# Altium PCB LoadCellV1_1.PcbDoc
Units mm, origin at the board's own origin, x right, y up, seen from the top; angles counter-clockwise.
Board outline 80 x 50 mm, 2 copper layers (Top Layer, Bottom Layer); 60 components, 52 nets, 202 pads, 201 vias.
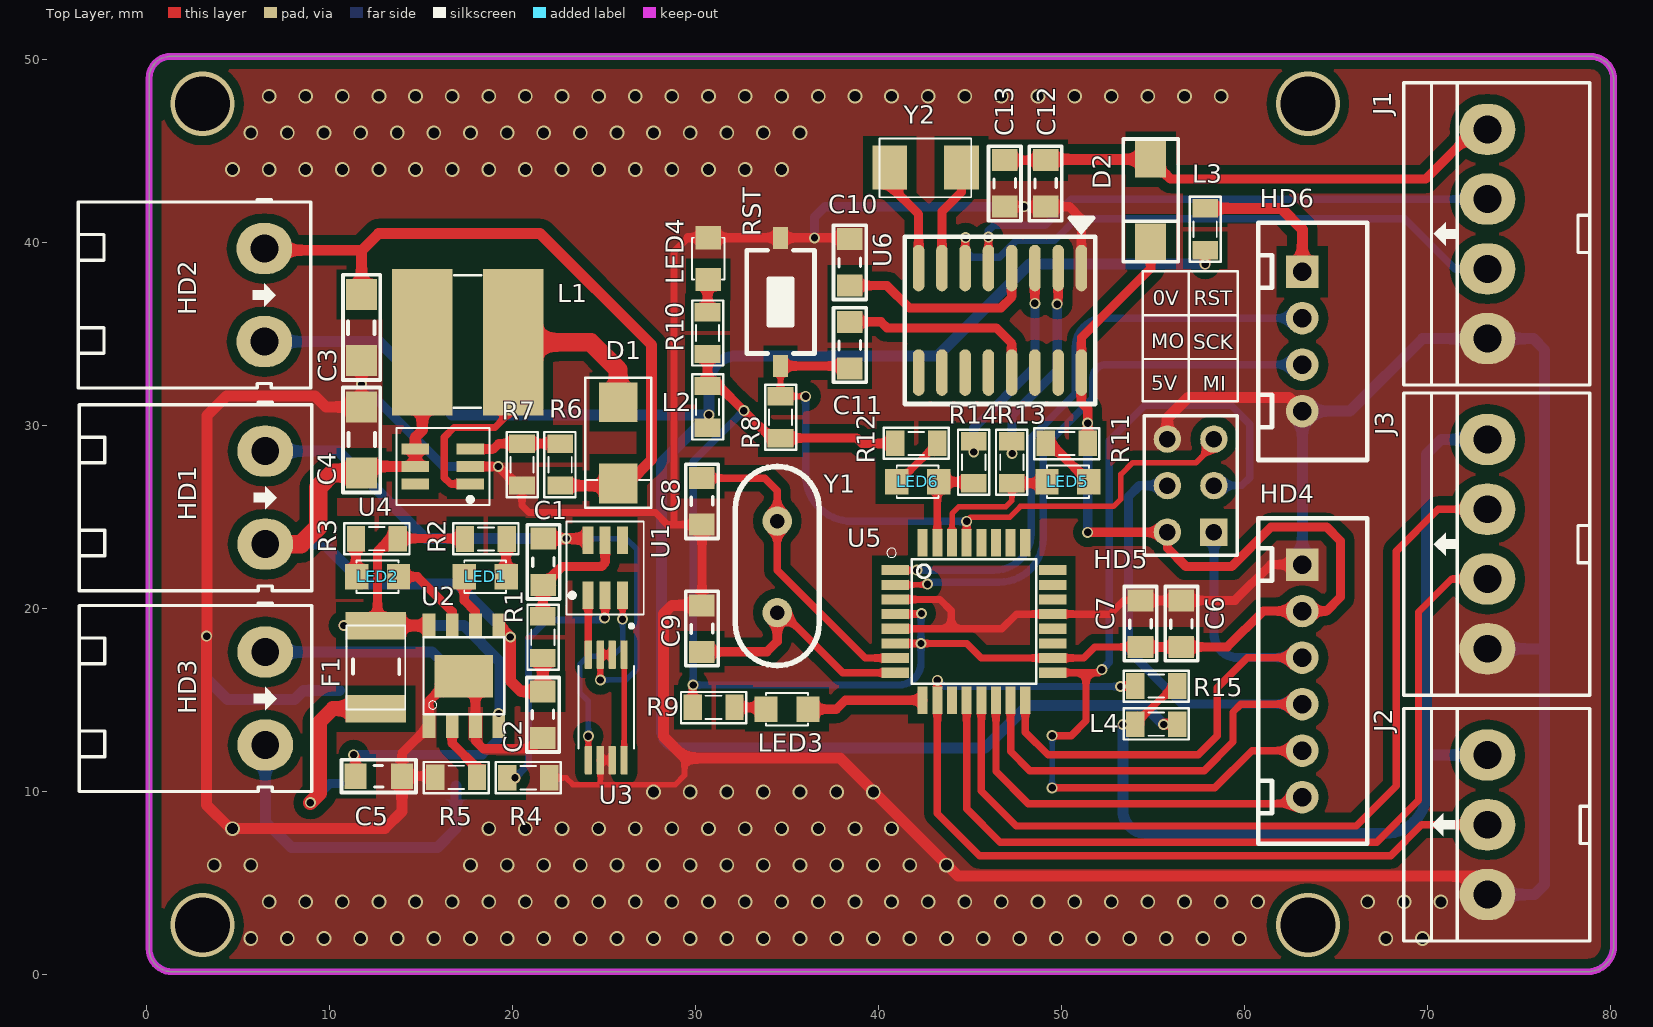
[diagram p0: Top Layer view]
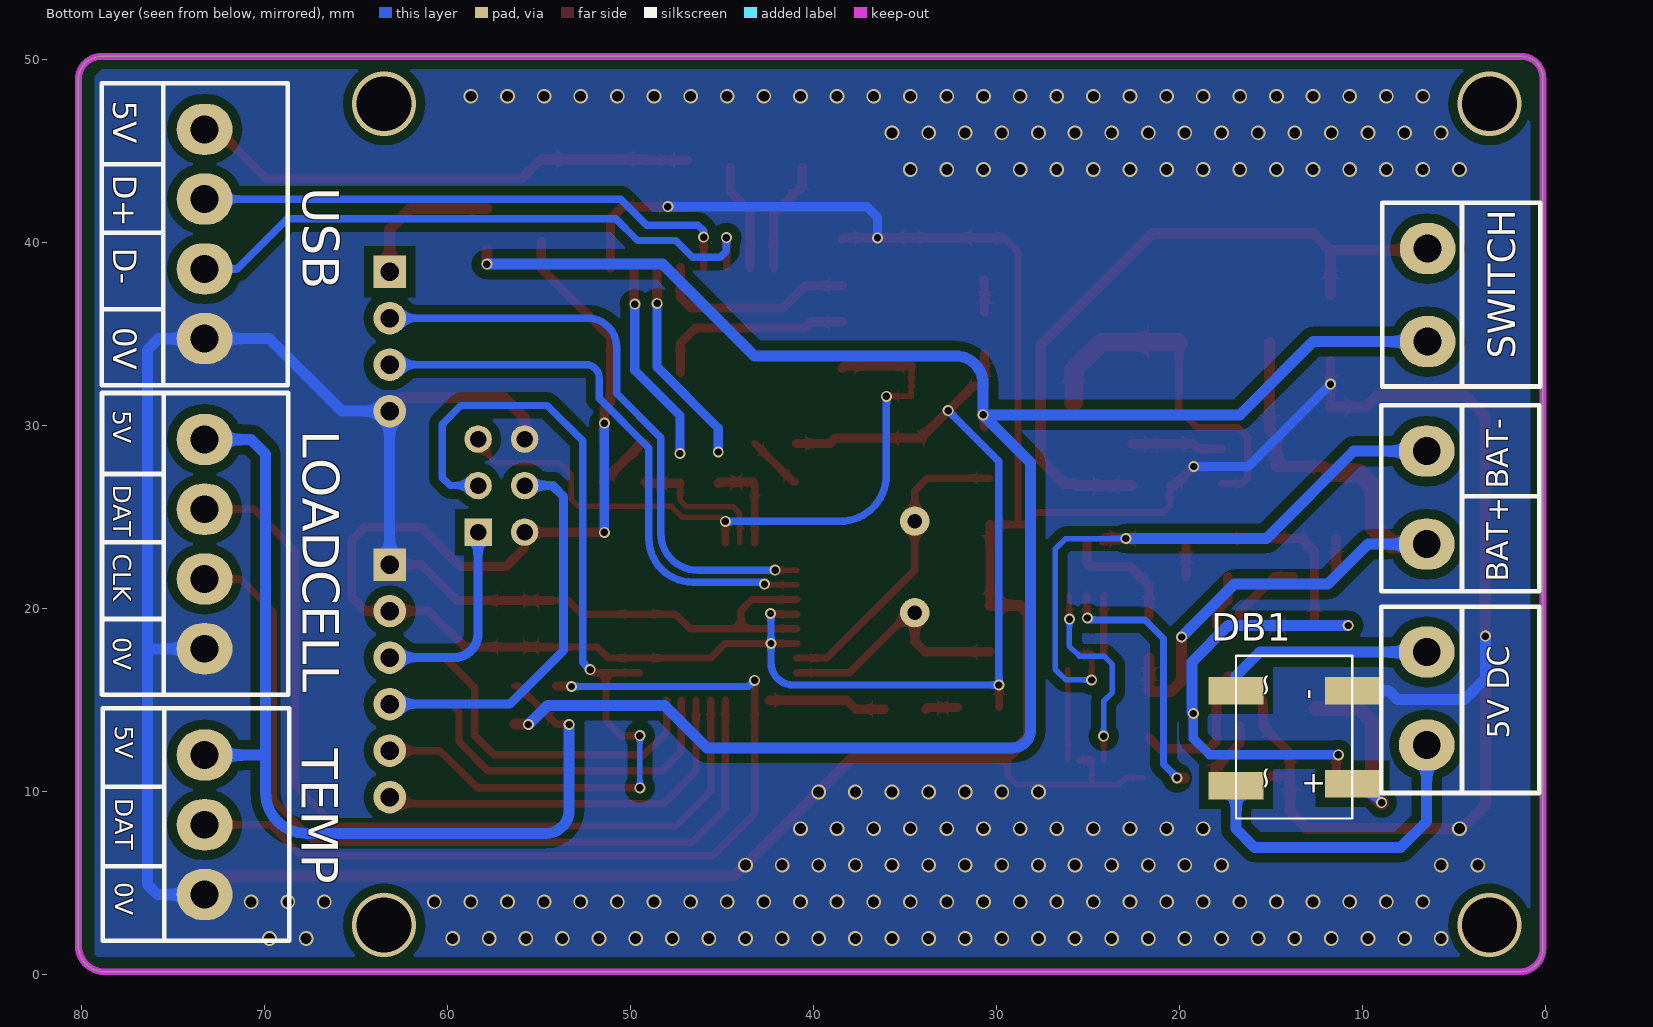
[diagram p1: Bottom Layer view, seen from below]
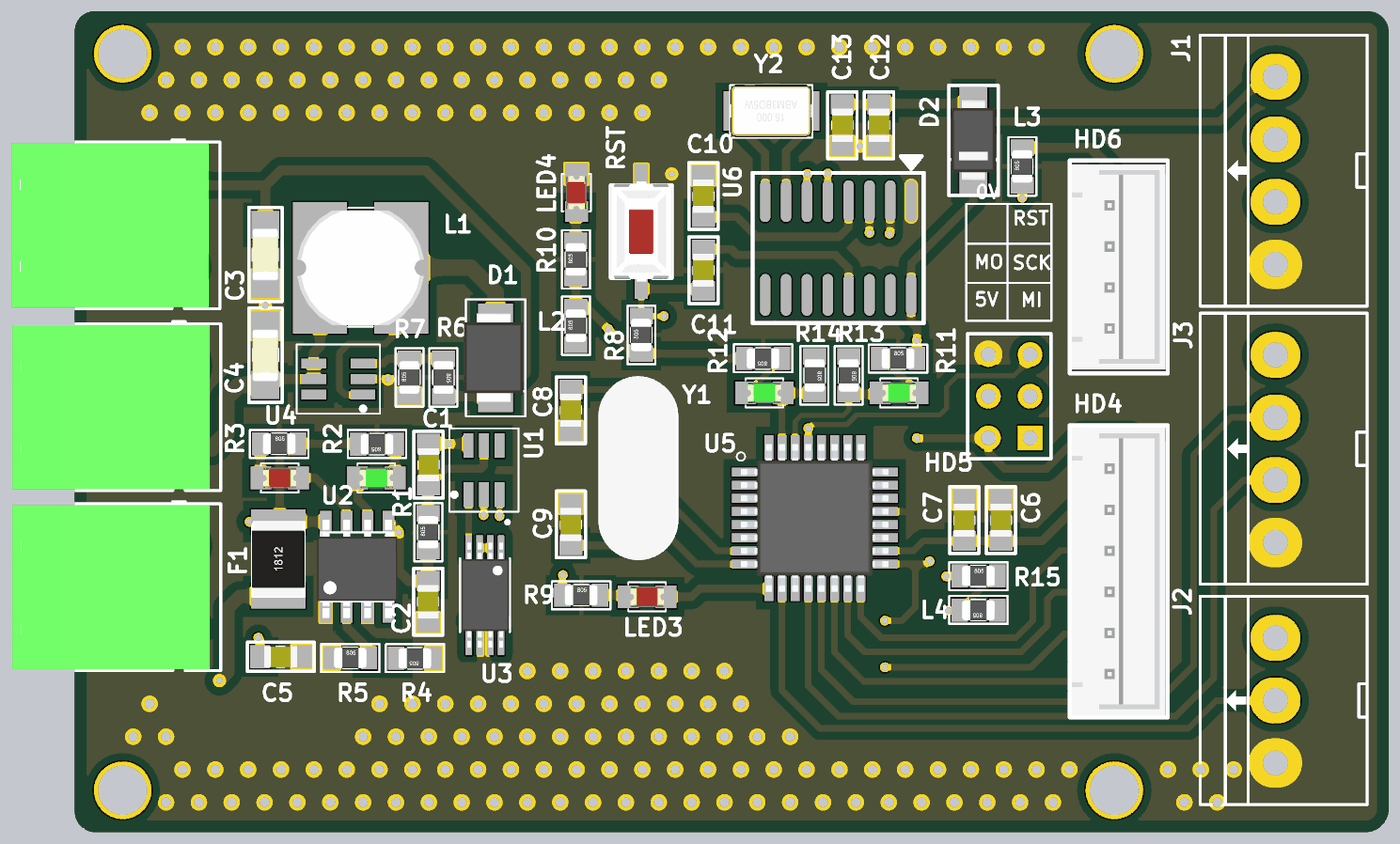
[diagram p2: 3D render of the assembled board from above, using the file's embedded part models]

## Layer stack, top to bottom
Top Solder: solder mask 0.0102, Solder Resist, Dk 3.5
Top Layer: signal copper 0.0356
Dielectric 1: dielectric 0.32, FR-4, Dk 4.8
Bottom Layer: signal copper 0.0356
Bottom Solder: solder mask 0.0102, Solder Resist, Dk 3.5

## Board outline
0.152,1.435 0.152,48.971 cw(c1.346,48.971) 1.346,50.165 78.882,50.165 cw(c78.882,48.895) 80.152,48.895 80.152,1.59 cw(c78.727,1.59) 78.727,0.165 1.422,0.165 cw(c1.422,1.435)

## Design rules (kind name [scope] priority, off if disabled: settings)
Clearance [All] p1: gap=0.254 ignorepadtopadclearanceinfootprint=FALSE except(0: Arc-Hole Track-Hole SMDPad-Hole THPad-Hole Via-Hole Fill-Hole Poly-Hole Region-Hole Text-Hole; 0.508: Arc-Fill Arc-Poly Arc-Region Track-Fill Track-Poly Track-Region SMDPad-Fill SMDPad-Poly SMDPad-Region THPad-Fill THPad-Poly THPad-Region Via-Fill Via-Poly Via-Region Fill-Fill Fill-Poly Fill-Region Poly-Poly Poly-Region Region-Region)
PolygonConnect [All] p1: connectstyle=Direct reliefconductorwidth=0.254 reliefentries=4 polygonreliefangle="90 Angle" airgapwidth=0.254
RoutingVias [All] p1: holewidth=0.4 width=0.6 viastyle="Through Hole" minholewidth=0.4 minwidth=0.6 maxholewidth=0.8 maxwidth=1
SolderMaskExpansion [All] p1: expansion=0.102
Width [All] p1: maxlimit=1.3 minlimit=0.3 preferedwidth=0.5
30 further rules are at their usual default settings.

## Classes and differential pairs
component class "U_[05] Sensor": J2 J3 L4 R15
component class "U_[04] CH340": C10 C11 C12 C13 D2 J1 LED5 LED6 R11 R12 R13 R14 U6 Y2
component class "U_[03] HMI Screen": HD6 L3
component class "U_[02] MCU": C6 C7 C8 C9 HD4 HD5 L2 LED3 LED4 R8 R9 R10 RST U5 Y1
component class "U_[01] Power Supply": C1 C2 C3 C4 C5 D1 DB1 F1 HD1 HD2 HD3 L1 LED1 LED2 R1 R2 R3 R4 R5 R6 R7 U1 U2 U3 U4

## Components (designator, comment, footprint, x,y, rotation, side; value= is the part's Value field where it differs from the comment)
C1 "104" CAP_0805 21.717,22.555 r270 top value=33p
C2 "10uF" CAP_0805 21.641,14.202 r90 top value=33p
C3 "22uF" CAP_1206 11.76,35.382 r90 top value=33p
C4 "22uF" CAP_1206 11.76,29.185 r270 top value=33p
C5 "104" CAP_0805 12.7,10.82 r180 top value=33p
C6 "10uF" CAP_0805 56.567,19.177 r270 top value=33p
C7 "104" CAP_0805 54.335,19.177 r270 top value=33p
C8 "Capacitor Ceramic" CAP_0805 30.328,25.857 r90 top value=33p
C9 "Capacitor Ceramic" CAP_0805 30.378,18.912 r270 top value=33p
C10 "104" CAP_0805 38.456,38.913 r270 top value=33p
C11 "104" CAP_0805 38.456,34.395 r270 top value=33p
C12 "104" CAP_0805 49.098,43.22 r90 top value=33p
C13 "10uF" CAP_0805 46.866,43.22 r90 top value=33p
D1 "SS34" DO-214AA 25.73,29.108 r90 top value="Diode c?m 1N5408"
D2 "1N5819" "DO-214AB SMA" 54.864,44.45 r270 top value=1N4007
DB1 "DB207S" DB207S 13.868,12.852 r270 bottom
F1 "F1A" RES-SMD-1812 12.548,16.535 r90 top value=Fuse
HD1 "PIN" HED2T 6.502,28.6 r270 top
HD2 "SWITCH" HED2T 6.452,39.665 r270 top
HD3 "DC_IN" HED2T 6.502,17.628 r270 top
HD4 "SDCARD" CON_6P 63.144,22.403 r270 top
HD5 "ISP" HDR2X3_CEN 58.318,24.181 r90 top
HD6 "HMI" CON_4P 63.144,38.405 r270 top
J1 "PWR" HED4B 73.254,34.747 r90 top value="Header 4"
J2 "DS18B20" "HED 3P 15EDG3.81" 76.378,8.268 r90 top
J3 "HX711" HED4B 73.254,17.805 r90 top value="Header 4"
L1 "22uH" CD75-220 17.501,34.544 r0 top value="150 mH"
L2 "100uH" RES-SMD-0805 30.658,31.013 r90 top value="150 mH"
L3 "100uH" RES-SMD-0805 57.836,40.716 r90 top value="150 mH"
L4 "100uH" RES-SMD-0805 55.169,13.69 r180 top value="150 mH"
LED1 "LED" LED-0805-Green 19.66,21.742 r180 top value="LED 3 ly Single Colour"
LED2 "LED" LED-0805-Red 11.493,21.742 r0 top value="LED 3 ly Single Colour"
LED3 "LED" LED-0805-Red 33.858,14.503 r0 top value="LED 3 ly Single Colour"
LED4 "LED" LED-0805-Red 30.696,37.973 r90 top value="LED 3 ly Single Colour"
LED5 "LED" LED-0805-Green 51.486,26.924 r180 top value="LED 3 ly Single Colour"
LED6 "LED" LED-0805-Green 40.996,26.924 r0 top value="LED 3 ly Single Colour"
R1 "100R" RES-SMD-0805 21.666,18.44 r90 top
R2 "1k" RES-SMD-0805 18.555,23.8 r180 top
R3 "1k" RES-SMD-0805 12.598,23.825 r0 top
R4 "1k" RES-SMD-0805 20.865,10.759 r180 top
R5 "1k" RES-SMD-0805 16.928,10.784 r0 top
R6 "15k" RES-SMD-0805 22.606,27.864 r270 top
R7 "2k" RES-SMD-0805 20.523,27.864 r90 top
R8 "10k" RES-SMD-0805 34.646,30.455 r90 top
R9 "1k" RES-SMD-0805 30.988,14.605 r0 top
R10 "1k" RES-SMD-0805 30.658,35.052 r90 top
R11 "1k" RES-SMD-0805 50.28,29.02 r0 top
R12 "1k" RES-SMD-0805 42.062,29.02 r180 top
R13 "1k" RES-SMD-0805 47.283,27.991 r270 top
R14 "1k" RES-SMD-0805 45.2,27.991 r270 top
R15 "4k7" RES-SMD-0805 55.169,15.773 r0 top
RST "SW-SMD" SW-SMD 34.646,36.754 r90 top (schematic designator S1)
U1 "DW01A" SOT23-6 25.067,22.225 r90 top
U2 "TP4056" TP4056 17.348,16.332 r90 top
U3 "FS8205A" FS8205A 25.07,14.605 r270 top
U4 "MT3608" MT3608 16.231,27.762 r180 top
U5 "ATmega328-AU" "TQFP 32" 45.212,19.355 r0 top
U6 "CH340G" SO16 46.634,35.747 r270 top
Y1 "16Mhz" XTAL 34.468,22.327 r90 top
Y2 "12MHz" "XTAL 5032 SMD" 42.545,44.094 r180 top

## Footprints (in the part's own frame and the unit in brackets; to place one, negate y for a bottom-side part, rotate by r counter-clockwise, add the part's x,y. Pads: shape width x height; smd on the part's side, far side on the other; paste and mask are expansions set on the pad)
CAP_0805 [mm]
  rect 1.2x1.4 smd: 1(-1.27,-0.025) 2(1.27,-0.025)
  silkscreen extent -2.03,-0.91 2.03,0.86, body extent -1.01,-0.66 1.01,0.61, height 0.61
CAP_1206 [mm]
  rect 1.7x1.7 smd: 1(-1.829,0) 2(1.778,0)
  silkscreen extent -2.9,-1.02 2.84,1.02, body extent -1.63,-0.8 1.57,0.8, height 0.94
CD75-220 [mm] "Power Inductor CD75 7.8x7x5mm"
  rect 3.3x8 smd: 1(-2.413,0) 2(2.54,0)
  silkscreen extent -0.71,-3.58 0.81,3.66, body extent -3.82,-3.5 3.92,3.5, height 5
CON_4P [mil]
  rect 70x70 hole 39.37 unplated: 1(0,0)
  round 70 hole 39.37 unplated: 2(100,0) 3(200,0)
  round 70 hole 39.37 unplated mask+4: 4(300,0)
  silkscreen extent -105,-95 405,140, body extent -96,-90 396,134, height 276
CON_6P [mil]
  rect 70x70 hole 39.37 unplated: 1(0,0)
  round 70 hole 39.37 unplated: 2(100,0) 3(200,0)
  round 70 hole 39.37 unplated mask+4: 4(300,0) 5(400,0) 6(500,0)
  silkscreen extent -100,-95 600,140, body extent -94,-90 594,134, height 276
DB207S [mm] "Bridge Rectifiers 2A 1000V"
  rect 1.5x3 smd: 1(2.413,3.302) 2(2.54,-3.048) 3(-2.667,-3.048) 4(-2.667,3.302)
  silkscreen extent -4.57,-3.05 4.32,3.3
DO-214AA [mm] "DO-214AA Diode Middle Size"
  rect 2.18x2.12 smd: 1(2.164,-0.051) 2(-2.266,-0.051)
  silkscreen extent -3.61,-1.86 3.51,1.76, body extent -2.75,-1.73 2.65,1.89, height 2.43
"DO-214AB SMA" [mm]
  rect 2x1.7 smd: 1(-0.092,0) 2(4.408,0)
  silkscreen extent -1.2,-1.5 5.5,1.51, body extent -0.37,-1.35 4.63,1.35, height 2.28
FS8205A [mm]
  rrect25% 1.56x0.4 smd: 1(-2.88,1.031) 2(-2.88,0.381) 3(-2.88,-0.269) 4(-2.88,-0.919) 5(2.88,-0.919) 6(2.88,-0.269) 7(2.88,0.381) 8(2.88,1.031)
  silkscreen extent -4.54,-1.46 2.25,1.57, body extent -3.2,-1.4 3.2,1.53, height 1.2
HDR2X3_CEN [mm] "Connector; Header; 3x2 Position"
  rect 1.5x1.5 hole 0.9: 1(0,0)
  round 1.5 hole 0.9: 2(2.54,0) 3(5.08,0) 4(0,2.54) 5(2.54,2.54) 6(5.08,2.54)
  silkscreen extent -1.27,-1.27 6.35,3.81, body extent -1.27,-1.27 6.35,3.81, height 7
HED2T [mil] "Header 2, 2 pin, hight 300mil, Pin to Pin 200, Colour Green"
  oval 110x120 hole 60: 1(0,0) 2(200,0)
  silkscreen extent -105,-400 300,100, body extent -97,-399 297,73, height 334
HED4B [mil] "Header 4, 4 pin, hight 300mil, Pin to Pin 150, Colour White"
  oval 110x120 hole 60: 1(0,0) 2(150,0) 3(300,0) 4(450,0)
  silkscreen extent -100,-220 550,180
"HED 3P 15EDG3.81" [mil]
  oval 110x120 hole 60: 1(-153,123) 2(-3,123) 3(147,123)
  silkscreen extent -253,-97 247,303
LED-0805-Green [mil]
  rect 50x55 smd: 1(0,0) 2(90,0)
  silkscreen extent 0,-35 90,35, body extent 5,-25 85,25, height 43
LED-0805-Red [mil]
  rect 50x55 smd: 1(0,0) 2(90,0)
  silkscreen extent 0,-35 90,35, body extent 5,-25 85,25, height 43
MT3608 [mm] "High Efficiency 1.2MHz  2A Step Up Converter"
  rect 1.5x0.6 smd: 1(-1.475,0.95) 2(-1.475,0) 3(-1.475,-0.95) 4(1.525,-0.95) 5(1.525,0) 6(1.525,0.95)
  silkscreen extent -2.51,-2.11 2.57,2.11, body extent -1.73,-1.52 1.78,1.53, height 1.45
RES-SMD-0805 [mil]
  rect 39.37x55 smd: 1(-45,0) 2(45,0)
  silkscreen extent -70,-34 70,33, body extent -39,-25 39,25, height 31
RES-SMD-1812 [mm] "Chip Capacitor, Body 3.2x2.5mm, IPC Medium Density"
  rect 1.5x3.3 smd: 1(-1.996,0) 2(2.54,0)
  silkscreen extent -2.04,-1.6 2.54,1.6, body extent -2,-1.6 2.5,1.6, height 0.6
SO16 [mm]
  oval 2.54x0.635 smd: 1(-2.854,4.445) 2(-2.854,3.175) 3(-2.854,1.905) 4(-2.854,0.635) 5(-2.854,-0.635) 6(-2.854,-1.905) 7(-2.854,-3.175) 8(-2.854,-4.445) 9(2.854,-4.445) 10(2.854,-3.175) 11(2.854,-1.905) 12(2.854,-0.635) 13(2.854,0.635) 14(2.854,1.905) 15(2.854,3.175) 16(2.854,4.445)
  silkscreen extent -5.59,-5.21 4.57,5.21, body extent -3.47,-4.95 3.47,4.95, height 1.75
SOT23-6 [mm] "SOT23, 5-Leads, Body 3.0x3.0mm (max), Pitch 0.95mm, IPC Medium Density"
  rect 1.5x0.6 smd: 1(-1.5,0.95) 2(-1.5,0) 3(-1.5,-0.95) 4(1.5,-0.95) 5(1.5,0) 6(1.5,0.95)
  silkscreen extent -2.54,-2.11 2.54,2.11, body extent -1.75,-1.52 1.75,1.53, height 1.45
SW-SMD [mm] "Switch SMD type"
  rect 1.2x0.8 smd: 1(-3.5,0) 2(3.5,0)
  silkscreen extent -2.82,-1.85 2.82,1.85, body extent -3.05,-1.85 3.05,1.85, height 2.5
TP4056 [mm]
  rect 1.3x0.7 smd: 1(-2.75,1.905) 2(-2.75,0.635) 3(-2.75,-0.635) 4(-2.75,-1.905) 5(2.75,-1.905) 6(2.75,-0.635) 7(2.75,0.635) 8(2.75,1.905)
  rect 2.3x3.2 smd: GND(-0.025,0)
  silkscreen extent -2.1,-2.2 2.1,2.2, body extent -3.13,-2.45 2.87,2.45, height 1.75
"TQFP 32" [mm] "TQFP 32 for ATmega328P"
  rect 1.5x0.55 smd: 1(-4.3,2.743) 2(-4.3,1.943) 3(-4.3,1.143) 4(-4.3,0.343) 5(-4.3,-0.457) 6(-4.3,-1.257) 7(-4.3,-2.057) 8(-4.3,-2.857) 17(4.3,-2.857) 18(4.3,-2.057) 19(4.3,-1.257) 20(4.3,-0.457) 21(4.3,0.343) 22(4.3,1.143) 23(4.3,1.943) 24(4.3,2.743)
  rect 0.55x1.5 smd: 9(-2.8,-4.357) 10(-2,-4.357) 11(-1.2,-4.357) 12(-0.4,-4.357) 13(0.4,-4.357) 14(1.2,-4.357) 15(2,-4.357) 16(2.8,-4.357) 25(2.8,4.243) 26(2,4.243) 27(1.2,4.243) 28(0.4,4.243) 29(-0.4,4.243) 30(-1.2,4.243) 31(-2,4.243) 32(-2.8,4.243)
  silkscreen extent -4.75,-3.46 3.4,3.95, body extent -4.5,-4.55 4.5,4.45, height 1.2
XTAL [mm]
  round 1.6 hole 0.8: 1(-2.552,0.001) 2(2.448,0.001)
  silkscreen extent -5.44,-2.29 5.44,2.29, body extent -5.55,-2.32 5.62,2.35, height 3.63
"XTAL 5032 SMD" [mm] "SMD 5032 XTAL Footprint"
  rect 1.9x2.4 smd: 1(-1.981,0) 2(1.93,0)
  silkscreen extent -2.51,-1.57 2.49,1.63, body extent -2.5,-1.6 2.5,1.6, height 1.31

## Part data
C1 C2 C3 C4 C5 C6 C7 C8 C9 C10 C11 C12 C13: library part CapSMD, "Capacitor", LatestRevisionDate=17-Jul-2002, LatestRevisionNote="Re-released for DXP Platform.", PackageReference=RAD-0.3, Published=8-Jun-2000, Publisher="Altium Limited"
D1: library part 1N5822, "Schottky Rectifiers"
D2: library part D1A_1, "Diode 1A"
DB1: library part "Diode Bridge Flate", "Diode Bridge"
F1: library part Fuse, "Fuse", Designed by=VanDungEvn
HD1 HD2 HD3: library part Header2, "Header IDC, 2 x 1 Pin Vertical 2.54mm Pitch (Non-Boxed, Male)", Manufacturer="Würth Elektronik eiSos GmbH", partNo=613002143121, ComponentLink1 Description=Manufacturer, ComponentLink1URL=http://www.we-online.com, ComponentLink2 Description=Datasheet, ComponentLink2URL=http://katalog.we-online.de/em/datasheet/6130xx143121.pdf, Created by="Karrer Zheng", Created Date="29 March 2013", NoPins=02
HD4: library part Header6, "Header IDC, 6 x 1 Pin Vertical 2.54mm Pitch (Non-Boxed, Male)", Manufacturer="Würth Elektronik eiSos GmbH", partNo=613002143121, ComponentLink1 Description=Manufacturer, ComponentLink1URL=http://www.we-online.com, ComponentLink2 Description=Datasheet, ComponentLink2URL=http://katalog.we-online.de/em/datasheet/6130xx143121.pdf, Created by="Karrer Zheng", Created Date="29 March 2013", NoPins=02
HD5: library part "Header 3X2A", "Header, 3-Pin, Dual row", LatestRevisionDate=17-Jul-2002, LatestRevisionNote="Re-released for DXP Platform.", Publisher="Altium Limited"
HD6: library part JP4, Manufacturer="Würth Elektronik eiSos GmbH", partNo=613004143121, ComponentLink1 Description=Manufacturer, ComponentLink1URL=http://www.we-online.com, ComponentLink2 Description=Datasheet, ComponentLink2URL=http://katalog.we-online.de/em/datasheet/6130xx143121.pdf, Created by="Karrer Zheng", Created Date="29 March 2013", NoPins=04
J1 J3: library part Hed4, "Header 4 (Green)"
J2: library part KF3, Manufacturer="Würth Elektronik eiSos GmbH", partNo=691103110003, ComponentLink1 Description=Manufacturer, ComponentLink1URL=http://www.we-online.com, ComponentLink2 Description=Datasheet, ComponentLink2URL=http://katalog.we-online.de/em/datasheet/6911031100xx.pdf, Created by="Karrer Zheng", Created Date="29 October 2013", NoPins=3
L1: library part Inductor, "Inductor 22uH CD75"
L2 L3 L4: library part Inductor, "Inductor"
LED1 LED2 LED3 LED4 LED5 LED6: "LED Single colour Green and Red"
R1 R2 R3 R4 R5 R6 R7 R8 R9 R10 R11 R12 R13 R14 R15: library part "Resistor - SMD", "Resistor", Manufacturer="Generic Components", Class=Passive, Published=08/06/2000, Publisher="Altium Hobart Technology Centre"
RST: "Switch", LatestRevisionDate=17-Jul-2002, LatestRevisionNote="Re-released for DXP Platform.", PackageReference=SPST-2, Published=24-Mar-1999, Publisher="Altium Limited"
U1: "One Cell Lithium-ion/Polymer Battery Protection IC"
U2: "Complete single cell Li-Ion battery with a constant current / constant voltage linear charger"
U4: "High Efficiency 1.2MHz 2A Step Up Converter"
U5: "8-bit AVR Microcontroller, 32KB Flash, 1KB EEPROM, 2KB SRAM, 32-pin TQFP, Industrial Grade (-40癈 to 85癈)", Code_JEDEC=MS-026-ABA, DatasheetVersion="revA, Jan-2010", PackageDescription="32-Lead, 7x7x1.0 mm Body, 0.8mm Lead Pitch, Thin Profile Plastic Quad Flat Package (TQFP)", PackageReference=32A, PackageVersion="revB, Oct-2001", Published=1-Apr-2010, Publisher="Altium Limited"
U6: "High and Low Side Driver", ComponentLink1Description="Manufacturer Link", ComponentLink1URL=http://www.irf.com/, ComponentLink2Description=Datasheet, ComponentLink2URL=http://www.irf.com/product-info/datasheets/data/ir2110.pdf, DatasheetVersion=PD60147J, LatestRevisionDate=04-Mar-2005, LatestRevisionNote="Stylized 3D Model Added.", Note="Pins 4, 8 and 14 are not connected", PackageDescription="DIP; 14 Leads; Row Spacing 7.62 mm; Pitch 2.54 mm", PackageReference=PDIP14, Published=8-Jun-2000, Publisher="Altium Limited"
Y1 Y2: library part XTAL, "Crystal Oscillator", LatestRevisionDate=17-Jul-2002, LatestRevisionNote="Re-released for DXP Platform.", PackageReference=R38, Published=8-Jun-2000, Publisher="Altium Limited"

## Via types
v1: diameter 0.8, hole 0.6, Top Layer to Bottom Layer, 156 vias
v2: diameter 0.6, hole 0.4, Top Layer to Bottom Layer, 41 vias
v3: diameter 3.5, hole 3, Top Layer to Bottom Layer, 4 vias

## Nets (pads, with @x,y where several pads share a name; then routed paths per layer and width w, separated by ;. In a path a pad name is that pad's centre, name@x,y a point inside that pad or via, vN(x,y) a via of type N, cw(c..) or ccw(c..) an arc to the next point about the centre after c; other vN are vias at no path point)
+5V: C5.2 F1.2 R2.2 R3.2 U2.4 U2.8 | length 37.6
  Top Layer w0.5: v2(11.328,12.014) 11.43,11.913 C5.2 ; F1.2 12.632,19.075 12.632,23.123 13.335,23.825 R3.2 17.386,23.825 R2.2 ; U2.8@15.436,19.075 U2.8 ; U2.4 v2(19.253,14.275)
  Top Layer w0.6: v2(10.795,19.075) F1.2 ; F1.2@12.632,19.075 U2.8@15.436,19.075
  Bottom Layer w0.5: v2(11.328,12.014) 18.364,12.014 19.253,12.903 v2(19.253,14.275)
  Bottom Layer w0.6: v2(10.795,19.075) 17.348,19.075 19.329,17.094 19.329,14.351 v2(19.253,14.275)
+5V_HMI: HD6.1 L3.2 | length 8.1
  Top Layer w0.6: L3.2 62.001,41.859 63.144,40.716 HD6.1
+5V_MCU: C6.2 C7.2 D2.2 HD4.2 HD5.4 L2.2 R8.1 R9.1 R10.1 R11.2 R12.2 U5.4 U5.6 U5.18 U6.16 | length 112.1
  Top Layer w0.4: R9.1 29.845,15.799 v2(29.87,15.824) ; U5.6 v2(42.316,18.098) 44.818,18.098 45.618,17.298 U5.18 51.207,17.298 51.816,17.907 C7.2 ; U5.4 42.304,19.698 v2(42.342,19.736)
  Top Layer w0.5: R10.1 L2.2 31.293,32.156 v2(32.639,30.81) 34.138,29.312 R8.1 38.811,29.312 39.103,29.02 R12.2 ; v2(51.423,24.167) 55.765,24.167 HD5.4 55.778,23.317 56.794,22.301 59.284,22.301 61.443,24.46 64.465,24.46 65.227,23.698 65.227,20.625 64.465,19.863 HD4.2 61.011,19.863 59.055,17.907 C6.2 C7.2 ; R11.2 v2(51.423,30.124) 51.423,30.898 51.079,31.242 U6.16 51.079,34.798 54.864,38.583 D2.2
  Bottom Layer w0.4: v2(32.639,30.81) 29.87,28.042 v2(29.87,15.824) 41.097,15.824 ccw(c41.097,17.043) 42.316,17.043 v2(42.316,18.098) 42.316,19.71 v2(42.342,19.736)
  Bottom Layer w0.5: v2(51.423,24.167) v2(51.423,30.124)
+5V_OUT: HD2.2 L2.1 L3.1 L4.1 | length 107.6
  Top Layer w0.4: L2.1 30.734,29.947 v2(30.734,30.582)
  Top Layer w0.6: v2(55.575,13.665) 55.6,13.69 L4.1 ; v2(57.836,38.811) L3.1
  Bottom Layer w0.6: HD2.2 12.71,34.585 16.713,30.582 v2(30.734,30.582) ; v2(55.575,13.665) 54.534,14.707 48.133,14.707 45.822,12.395 29.134,12.395 cw(c29.134,13.386) 28.143,13.386 28.143,27.991 v2(30.734,30.582) ; v2(57.836,38.811) 48.235,38.811 43.231,33.807 32.258,33.807 ccw(c32.258,32.283) 30.734,32.283 v2(30.734,30.582)
+5V_SEN: J2.3 J3.4 L4.2 R15.2 | length 52.6
  Top Layer w0.4: v2(53.34,13.665) 53.365,13.69 L4.2 56.109,15.773 R15.2
  Bottom Layer w0.6: v2(53.34,13.665) 53.34,8.992 ccw(c54.61,8.992) 54.61,7.722 67.691,7.722 ccw(c67.691,9.957) 69.926,9.957 69.926,12.014 ; J2.3 69.939,12.002 69.926,12.014 ; J3.4 70.714,29.235 69.926,28.448 69.926,12.014
+5V_USB: C12.2 C13.2 D2.1 J1.4 | length 28
  Top Layer w0.5: C13.2 C12.2 ; D2.1 55.947,43.459 69.875,43.459 72.593,46.177 J1.4
  Top Layer w0.6: C12.2 49.175,44.542 D2.1
"BAT -": C1.1 HD1.1 U1.6 U3.2 U3.3 | length 35.8
  Top Layer w0.3: v2(24.801,16.104) U3.3
  Top Layer w0.4: U3.3 U3.2
  Top Layer w0.6: C1.1 v2(22.936,23.825) 24.017,23.825 U1.6
  Bottom Layer w0.3: v2(22.936,23.825) 26.213,23.825 26.797,23.241 26.797,16.688 26.213,16.104 v2(24.801,16.104)
  Bottom Layer w0.6: HD1.1 10.49,28.6 15.265,23.825 v2(22.936,23.825)
BAT+: C2.2 C4.2 HD1.2 L1.1 R1.1 U2.5 U4.4 U4.5 | length 40.8
  Top Layer w0.6: C4.2 12.116,27.762 U4.5 U4.4 14.705,29.361 15.088,29.743 L1.1 ; U2.5 v2(19.888,18.447) 19.888,16.053 20.469,15.472 C2.2 R1.1
  Top Layer w1: HD1.2 8.458,23.52 9.398,24.46 9.398,26.619 10.185,27.407 C4.2
  Bottom Layer w0.6: HD1.2 9.703,23.52 11.887,21.336 16.999,21.336 v2(19.888,18.447)
CH340_RX: LED5.2 R13.2 U5.30 | length 8.1
  Top Layer w0.3: U5.30 44.012,25.191 44.374,25.552 46.939,25.552 47.283,25.896 R13.2
  Top Layer w0.5: R13.2 49.124,26.848 LED5.2
CH340_TX: LED6.2 R14.2 U5.31 | length 5.3
  Top Layer w0.3: LED6.2@43.212,26.854 LED6.2
  Top Layer w0.4: U5.31 LED6.2@43.212,26.854
  Top Layer w0.5: LED6.2 45.123,26.924 R14.2
D+: J1.3 U6.5 | length 30
  Top Layer w0.4: U6.5 v2(45.999,40.284)
  Bottom Layer w0.4: v2(45.999,40.284) 45.999,40.64 46.304,40.945 49.098,40.945 50.521,42.367 J1.3
D-: J1.2 U6.6 | length 33.1
  Top Layer w0.4: U6.6 44.729,40.234 v2(44.755,40.259)
  Bottom Layer w0.4: v2(44.755,40.259) 44.755,39.522 45.085,39.192 46.609,39.192 47.523,40.107 49.606,40.107 50.8,41.3 68.732,41.3 71.475,38.557 J1.2
DS18_DAT: J2.2 R15.1 U5.10 | length 49.9
  Top Layer w0.4: v2(43.212,16.085) U5.10 43.212,8.807 45.517,6.502 67.97,6.502 69.659,8.191 J2.2
  Top Layer w0.5: v2(53.213,15.748) 53.238,15.773 R15.1
  Bottom Layer w0.4: v2(43.212,16.085) 43.549,15.748 v2(53.213,15.748)
GND: C2.1 C3.1 C4.1 C5.1 C6.1 C7.1 C8.1 C9.1 C10.1 C12.1 C13.1 DB1.4 HD4.1 HD5.6 HD6.4 J1.1 J2.1 J3.1 LED4.2 R4.1 R5.1 R7.1 RST.2 U2.1 U2.3 U3.6 U3.7 U4.2 U5.3 U5.5 U5.21 U6.1 | length 311.6
  Top Layer w0.3: R4.1 22.936,10.759 23.306,10.389 24.765,10.389 ; U3.6 24.801,10.424 24.765,10.389 ; 29.413,11.836 29.413,10.897 28.905,10.389 24.765,10.389
  Top Layer w0.4: R7.1 20.523,25.629 20.904,25.248 27.813,25.248 28.473,24.587 28.829,24.587 ; U3.6 U3.7 ; 29.591,40.259 28.829,39.497 28.829,24.587 ; C8.1 28.829,24.587 ; U5.5 43.967,18.898 ; U5.3 43.358,20.498 43.967,19.888 43.967,18.898 ; C7.1 53.391,20.447 52.642,19.698 U5.21 47.536,19.698 46.736,18.898 43.967,18.898
  Top Layer w0.5: C4.1 v2(11.76,32.258) C3.1 ; R5.1 15.723,10.846 C5.1 13.97,12.109 U2.1 15.443,14.961 16.789,16.307 17.348,16.307 17.983,15.672 U2.3 17.983,12.776 18.415,12.344 21.079,12.344 C2.1 ; U4.2 v2(19.228,27.762) 20.269,26.721 R7.1 ; 29.591,40.259 LED4.2 34.64,40.259 RST.2 v2(36.5,40.254) 38.359,40.254 C10.1 ; C9.1 C8.1 ; C13.1 v2(47.955,41.95) C12.1 50.43,41.95 51.079,41.3 U6.1 ; C7.1 C6.1 59.461,20.447 61.417,22.403 HD4.1
  Top Layer w0.6: v2(3.302,18.491) 3.302,9.271 4.597,7.976 13.03,7.976 13.97,8.915 C5.1 ; v2@3.327,18.542 3.327,30.556 4.394,31.623 9.22,31.623 9.83,31.013 C4.1 ; C9.1 28.716,20.182 28.245,19.71 28.245,13.005 29.413,11.836 37.897,11.836 44.348,5.385 72.25,5.385 J2.1 ; HD5.6 55.778,30.404 56.896,31.521 62.408,31.521 HD6.4
  Bottom Layer w0.5: v2(11.76,32.258) 16.256,27.762 v2(19.228,27.762) ; v2(36.5,40.254) 36.5,41.377 37.073,41.95 v2(47.955,41.95)
  Bottom Layer w0.6: v2(3.302,18.491) 3.302,16.18 4.445,15.037 8.103,15.037 8.585,15.519 DB1.4 ; HD4.1 HD6.4 65.761,30.785 69.723,34.747 J1.1 75.768,34.747 76.378,34.138 76.378,17.729 ; J2.1 75.832,4.381 76.378,4.928 76.378,17.729 ; J3.1 76.302,17.805 76.378,17.729
  other v1: 5.711,1.984 7.711,1.984 9.711,1.984 11.711,1.984 13.711,1.984 15.711,1.984 17.711,1.984 19.711,1.984 21.711,1.984 23.711,1.984 25.711,1.984 27.711,1.984 29.711,1.984 31.711,1.984 33.711,1.984 35.711,1.984 37.711,1.984 39.711,1.984 41.711,1.984 43.711,1.984 45.711,1.984 47.711,1.984 49.711,1.984 51.711,1.984 53.711,1.984 55.711,1.984 57.711,1.984 59.711,1.984 67.711,1.984 69.711,1.984 6.711,3.984 8.711,3.984 10.711,3.984 12.711,3.984 14.711,3.984 16.711,3.984 18.711,3.984 20.711,3.984 22.711,3.984 24.711,3.984 26.711,3.984 28.711,3.984 30.711,3.984 32.711,3.984 34.711,3.984 36.711,3.984 38.711,3.984 40.711,3.984 42.711,3.984 44.711,3.984 46.711,3.984 48.711,3.984 50.711,3.984 52.711,3.984 54.711,3.984 56.711,3.984 58.711,3.984 60.711,3.984 66.711,3.984 68.711,3.984 70.711,3.984 3.711,5.984 5.711,5.984 17.711,5.984 19.711,5.984 21.711,5.984 23.711,5.984 25.711,5.984 27.711,5.984 29.711,5.984 31.711,5.984 33.711,5.984 35.711,5.984 37.711,5.984 39.711,5.984 41.711,5.984 43.711,5.984 4.711,7.984 18.711,7.984 20.711,7.984 22.711,7.984 24.711,7.984 26.711,7.984 28.711,7.984 30.711,7.984 32.711,7.984 34.711,7.984 36.711,7.984 38.711,7.984 40.711,7.984 27.711,9.984 29.711,9.984 31.711,9.984 33.711,9.984 35.711,9.984 37.711,9.984 39.711,9.984 4.711,43.984 6.711,43.984 8.711,43.984 10.711,43.984 12.711,43.984 14.711,43.984 16.711,43.984 18.711,43.984 20.711,43.984 22.711,43.984 24.711,43.984 26.711,43.984 28.711,43.984 30.711,43.984 32.711,43.984 34.711,43.984 5.711,45.984 7.711,45.984 9.711,45.984 11.711,45.984 13.711,45.984 15.711,45.984 17.711,45.984 19.711,45.984 21.711,45.984 23.711,45.984 25.711,45.984 27.711,45.984 29.711,45.984 31.711,45.984 33.711,45.984 35.711,45.984 6.711,47.984 8.711,47.984 10.711,47.984 12.711,47.984 14.711,47.984 16.711,47.984 18.711,47.984 20.711,47.984 22.711,47.984 24.711,47.984 26.711,47.984 28.711,47.984 30.711,47.984 32.711,47.984 34.711,47.984 36.711,47.984 38.711,47.984 40.711,47.984 42.711,47.984 44.711,47.984 46.711,47.984 48.711,47.984 50.711,47.984 52.711,47.984 54.711,47.984 56.711,47.984 58.711,47.984
HMI_RX: HD6.2 U5.1 | length 33
  Top Layer w0.3: U5.1 v2(42.088,22.098)
  Bottom Layer w0.4: v2(42.088,22.098) 46.329,22.098 ccw(c46.329,24.105) 48.336,24.105 48.336,29.337 50.749,31.75 50.749,34.29 cw(c52.324,34.29) 52.324,35.865 HD6.2
HMI_TX: HD6.3 U5.2 | length 31.3
  Top Layer w0.3: U5.2 42.71,21.298 v2(42.672,21.336)
  Bottom Layer w0.4: v2(42.672,21.336) 42.78,21.444 46.6,21.444 ccw(c46.6,23.834) 48.99,23.834 48.99,28.772 51.708,31.49 51.708,32.607 cw(c52.426,32.607) 52.426,33.325 HD6.3
HX711_CLK: J3.2 U5.12 | length 47.1
  Top Layer w0.4: U5.12 44.812,9.061 46.634,7.239 67.208,7.239 69.494,9.525 69.494,19.812 71.298,21.615 J3.2
HX711_DAT: J3.3 U5.13 | length 48.1
  Top Layer w0.4: U5.13 45.612,10.039 47.523,8.128 66.091,8.128 68.275,10.312 68.275,23.139 70.561,25.425 J3.3
NetC1_2: C1.2 R1.2 U1.5 | length 6.8
  Top Layer w0.5: R1.2 21.666,21.26 C1.2 22.708,22.301 24.867,22.301 25.067,22.502 U1.5
NetC3_2: C3.2 D1.2 HD2.1 R6.2 | length 38.3
  Top Layer w0.6: HD2.1@6.452,39.573 11.735,39.573 11.76,39.548 ; C3.2 11.76,39.548 ; R6.2 25.659,26.721 D1.2 26.309,26.843 27.61,28.143 27.61,34.392 21.514,40.488 12.7,40.488 11.76,39.548
NetC8_2: C8.2 U5.7 Y1.2 | length 17.2
  Top Layer w0.4: C8.2 33.782,27.127 34.467,26.442 Y1.2 34.467,22.099 39.268,17.298 U5.7
NetC9_2: C9.2 U5.8 Y1.1 | length 13.7
  Top Layer w0.3: Y1.1 Y1.1@34.759,19.775
  Top Layer w0.4: Y1.1@34.759,19.775 38.036,16.498 U5.8
  Top Layer w0.5: C9.2 33.898,17.642 34.467,18.211 Y1.1
NetC10_2: C10.2 U6.4 | length 11.2
  Top Layer w0.5: C10.2 40.462,37.643 41.681,36.424 46.688,36.424 47.269,37.005 U6.4 U6.4@47.269,38.633
NetC11_1: C11.1 U6.13 | length 10.9
  Top Layer w0.5: C11.1 40.129,35.665 40.462,35.331 46.431,35.331 47.269,34.493 U6.13
NetD1_1: D1.1 L1.2 U4.1 | length 20
  Top Layer w0.4: U4.1 16.622,26.812 16.281,27.153 16.281,29.362 16.815,29.896 19.05,29.896 20.041,30.886 L1.2
  Top Layer w1: L1.2 24.282,34.544 25.781,33.045 D1.1
NetDB1_1: DB1.1 F1.1 | length 10
  Top Layer w0.8: v2(8.966,9.398) 9.474,9.906 9.474,13.818 10.196,14.54 F1.1
  Bottom Layer w0.5: v2(8.966,9.398) 10.008,10.439 DB1.1
NetDB1_2: DB1.2 HD3.2 | length 17.9
  Bottom Layer w0.6: HD3.2 6.502,8.382 7.925,6.96 15.9,6.96 16.916,7.976 DB1.2
NetDB1_3: DB1.3 HD3.1 | length 11.8
  Bottom Layer w0.6: HD3.1 15.621,17.628 16.916,16.332 DB1.3
NetLED1_1: LED1.1 R2.1 | length 2.1
  Top Layer w0.5: LED1.1 19.66,23.762 R2.1
NetLED1_2: LED1.2 U2.6 | length 2.9
  Top Layer w0.5: LED1.2 17.374,20.447 17.983,19.837 U2.6
NetLED2_1: LED2.1 R3.1 | length 2.1
  Top Layer w0.5: R3.1 11.455,21.781 LED2.1
NetLED2_2: LED2.2 U2.7 | length 4.5
  Top Layer w0.5: LED2.2 14.808,21.742 16.713,19.837 U2.7
NetLED3_1: LED3.1 R9.2 | length 1.8
  Top Layer w0.5: R9.2 33.757,14.605 LED3.1
NetLED4_1: LED4.1 R10.2 | length 1.8
  Top Layer w0.5: R10.2 30.658,37.935 LED4.1
NetLED5_1: LED5.1 R11.1 | length 3.2
  Top Layer w0.5: R11.1 49.39,29.02 LED5.1
NetLED6_1: LED6.1 R12.1 | length 3.1
  Top Layer w0.4: LED6.1 41.11,26.924 R12.1
NetR4_2: R4.2 U1.2 | length 14.2
  Top Layer w0.4: v2(25.044,19.482) 25.067,19.504 U1.2
  Top Layer w0.6: R4.2 v2(20.142,10.759)
  Bottom Layer w0.4: v2(20.142,10.759) 20.879,11.495 20.879,18.364 21.895,19.38 24.943,19.38 v2(25.044,19.482)
NetR5_2: R5.2 U2.2 | length 3.4
  Top Layer w0.5: U2.2 16.713,12.649 18.071,11.292 R5.2
NetR6_1: R6.1 R7.2 U4.3 | length 5
  Top Layer w0.5: U4.3 18.959,28.712 19.253,29.007 R7.2 R6.1
NetR13_1: R13.1 U6.2 | length 11.8
  Top Layer w0.5: R13.1 47.283,28.486 v2(47.295,28.473) ; v2(49.759,36.627) 49.809,36.678 U6.2
  Bottom Layer w0.5: v2(47.295,28.473) 47.295,30.556 49.759,33.02 v2(49.759,36.627)
NetR14_1: R14.1 U6.3 | length 12
  Top Layer w0.5: v2(45.2,28.55) R14.1 ; v2(48.539,36.678) U6.3
  Bottom Layer w0.5: v2(45.2,28.55) 45.2,29.858 48.539,33.198 v2(48.539,36.678)
NetU1_1: U1.1 U3.4 | length 3.3
  Top Layer w0.4: U1.1 24.151,20.691 U3.4
NetU1_3: U1.3 U3.5 | length 11
  Top Layer w0.3: U3.5 v2(24.151,13.035) ; v2(26.017,19.424) U1.3
  Bottom Layer w0.3: v2(24.151,13.035) 24.151,14.94 23.673,15.418 23.673,16.942 24.13,17.399 25.476,17.399 26.017,17.94 v2(26.017,19.424)
NetU3_1: U3.1 U3.8 | length 4.9
  Top Layer w0.3: U3.8 26.101,16.652
NetU6_7: U6.7 Y2.1 | length 5.9
  Top Layer w0.5: U6.7 43.459,41.681 44.526,42.748 Y2.1
NetU6_8: U6.8 Y2.2 | length 6.1
  Top Layer w0.5: Y2.2 40.615,43.104 42.189,41.529 U6.8
RESET: C11.2 HD5.3 R8.2 RST.1 U5.29 | length 38.9
  Top Layer w0.3: RST.1 R8.2 v2(36.017,31.598) ; v2(44.812,24.765) 45.045,24.998 47.169,24.998 47.748,25.578 52.832,25.578 53.238,25.984 53.238,27.33 53.873,27.965 57.328,27.965 58.318,28.956 HD5.3
  Top Layer w0.4: U5.29 v2(44.812,24.765)
  Top Layer w0.5: RST.1 38.301,33.254 C11.2
  Bottom Layer w0.4: v2(36.017,31.598) 36.017,27.305 ccw(c38.557,27.305) 38.557,24.765 v2(44.812,24.765)
SPI_MISO: HD4.3 HD5.1 U5.16 | length 32.2
  Top Layer w0.4: U5.16 48.012,13.253 49.251,12.014 57.455,12.014 58.496,13.056 58.496,15.672 60.147,17.323 HD4.3
  Bottom Layer w0.5: HD5.1 58.318,18.644 ccw(c59.639,18.644) 59.639,17.323 HD4.3
SPI_MOSI: HD4.4 HD5.5 U5.15 | length 43.1
  Top Layer w0.4: U5.15 47.212,12.199 48.26,11.151 57.785,11.151 59.36,12.725 59.36,14.351 59.792,14.783 HD4.4
  Bottom Layer w0.5: HD5.5 54.254,26.721 53.645,26.111 53.645,17.729 56.591,14.783 HD4.4
SPI_SCK: HD4.5 HD5.2 U5.17 | length 51.5
  Top Layer w0.4: v2(49.479,10.211) 58.369,10.211 60.401,12.243 HD4.5 ; v2(49.479,13.056) 50.521,13.056 51.333,13.868 51.333,16.498 ; U5.17 51.333,16.498 ; v2(52.197,16.662) 52.032,16.498 51.333,16.498
  Bottom Layer w0.3: v2(49.479,10.211) v2(49.479,13.056)
  Bottom Layer w0.4: v2(52.197,16.662) 52.603,17.069 52.603,29.159 54.534,31.09 59.258,31.09 60.274,30.074 60.274,27.153 59.842,26.721 HD5.2
SPI_SS: HD4.6 U5.14 | length 21.5
  Top Layer w0.4: U5.14 46.412,11.119 48.184,9.347 62.789,9.347 HD4.6
USER_LED: LED3.2 U5.9 | length 6.5
  Top Layer w0.5: LED3.2 37.694,14.503 38.188,14.998 U5.9
pads on no net: U1.4 U2.GND U4.6 U5.11 U5.19 U5.20 U5.22 U5.23 U5.24 U5.25 U5.26 U5.27 U5.28 U5.32 U6.9 U6.10 U6.11 U6.12 U6.14 U6.15
copper on no net: | length 0.4
  Top Layer w1: 6.502,12.548 6.909,12.548
  other v3: 3.073,2.718 63.449,2.718 3.073,47.574 63.449,47.574

## Polygon pours and split planes (outlines as drawn)
GND on Bottom Layer "BOT_GND" (solid, remove dead copper, pour order 2): 0.356,49.784 78.537,49.784 79.248,49.073 79.248,0.991 0.457,0.991 0.356,1.092
GND on Top Layer "TOP_GND" (solid, remove dead copper, pour order 0): -0.076,50.394 80.239,50.394 80.289,50.444 80.366,50.368 80.366,-0.051 0.102,-0.051 -0.076,0.127

## Keep-outs
Keep-Out Layer:
  lines w0.381: 0.152,1.435 ccw(c1.422,1.435) 1.422,0.165 2.045,0.165 78.727,0.165 ccw(c78.727,1.59) 80.152,1.59 80.152,48.448 80.152,48.895 ccw(c78.882,48.895) 78.882,50.165 78.435,50.165 1.346,50.165 ccw(c1.346,48.971) 0.152,48.971 0.152,2.057 0.152,1.435

## Silkscreen, mask and mechanical layers (free items; w line width, h text height)
Top Overlay:
  lines w0.127: 54.432,33.63 59.614,33.63 ; 54.432,36.017 59.614,36.017 ; 56.947,31.318 56.947,38.43 ; 54.432,31.318 54.432,38.43 59.614,38.43 59.614,31.318 54.432,31.318
  text "0V" at 54.966,36.576 h0.8
  text "RST" at 57.226,36.576 h0.8
  text "MO" at 54.889,34.214 h0.8
  text "SCK" at 57.201,34.163 h0.8
  text "5V" at 54.894,31.928 h0.8
  text "MI" at 57.709,31.902 h0.8
Bottom Overlay:
  lines w0.254: 0.305,37.109 0.305,37.148 ; 0.406,26.137 4.597,26.137 ; 4.572,9.931 4.572,20.091 ; 4.572,20.955 4.572,31.115 ; 4.572,37.109 4.572,32.233 4.572,42.164 8.941,42.164 ; 75.438,1.854 75.463,1.854 75.463,14.554 ; 75.489,5.918 78.816,5.918 ; 75.489,15.291 75.489,31.775 ; 75.489,19.431 78.857,19.431 78.857,19.406 ; 75.489,23.622 78.857,23.622 ; 75.489,27.356 78.816,27.356 ; 75.514,10.262 78.816,10.262 ; 75.514,32.207 75.514,48.692 ; 75.514,36.347 78.882,36.347 78.882,36.322 ; 75.514,40.538 78.882,40.538 ; 75.514,44.272 78.842,44.272 ; 8.941,42.164 8.941,32.131 0.305,32.131 0.305,42.164 8.941,42.164 ; 0.356,9.931 0.356,20.091 8.992,20.091 8.992,9.931 0.356,9.931 ; 0.356,20.955 8.992,20.955 8.992,31.115 0.356,31.115 0.356,20.955 ; 68.631,1.854 78.816,1.854 78.816,14.554 68.631,14.554 68.631,1.854 ; 68.682,15.291 68.682,31.775 78.857,31.775 78.857,15.291 68.682,15.291 ; 68.707,32.207 78.882,32.207 78.882,48.692 68.707,48.692 68.707,32.207
  text "5V" at 78.232,47.752 h1.3 r90
  text "D+" at 78.232,43.688 h1.3 r90
  text "USB" at 67.894,43.028 h2 r90
  text "D-" at 78.232,39.7 h1.3 r90
  text "0V" at 78.232,35.357 h1.3 r90
  text "SWITCH" at 1.676,33.655 h1.5 r270
  text "5V" at 78.232,30.836 h1 r90
  text "LOADCELL" at 67.894,29.743 h2 r90
  text "DAT" at 78.232,26.772 h1 r90
  text "BAT-" at 2.057,26.543 h1.2 r270
  text "CLK" at 78.232,22.987 h1 r90
  text "BAT+" at 2.057,21.463 h1.2 r270
  text "0V" at 78.232,18.44 h1 r90
  text "5V" at 78.13,13.614 h1 r90
  text "5V DC" at 2.007,12.903 h1.2 r270
  text "TEMP" at 67.945,12.344 h2 r90
  text "DAT" at 78.13,9.652 h1 r90
  text "0V" at 78.13,5.055 h1 r90

## Text inside footprints (layer, text, board x,y; h text height)
DB1: Bottom Overlay "~" at 15.773,15.138 h1.2 r90; Bottom Overlay "~" at 15.773,10.058 h1.2 r90; Bottom Overlay "-" at 13.36,15.011 h1.2 r90; Bottom Overlay "+" at 13.36,10.947 h1.2 r180